# Altium PCB bqZUM_Scan_Shield.PcbDoc
Units mm, origin at the board's own origin, x right, y up, seen from the top; angles counter-clockwise.
Board outline 68.58 x 53.34 mm, 2 copper layers (Top Layer, Bottom Layer), stack 1.671 mm thick; 26 components, 41 nets, 129 pads, 41 vias.
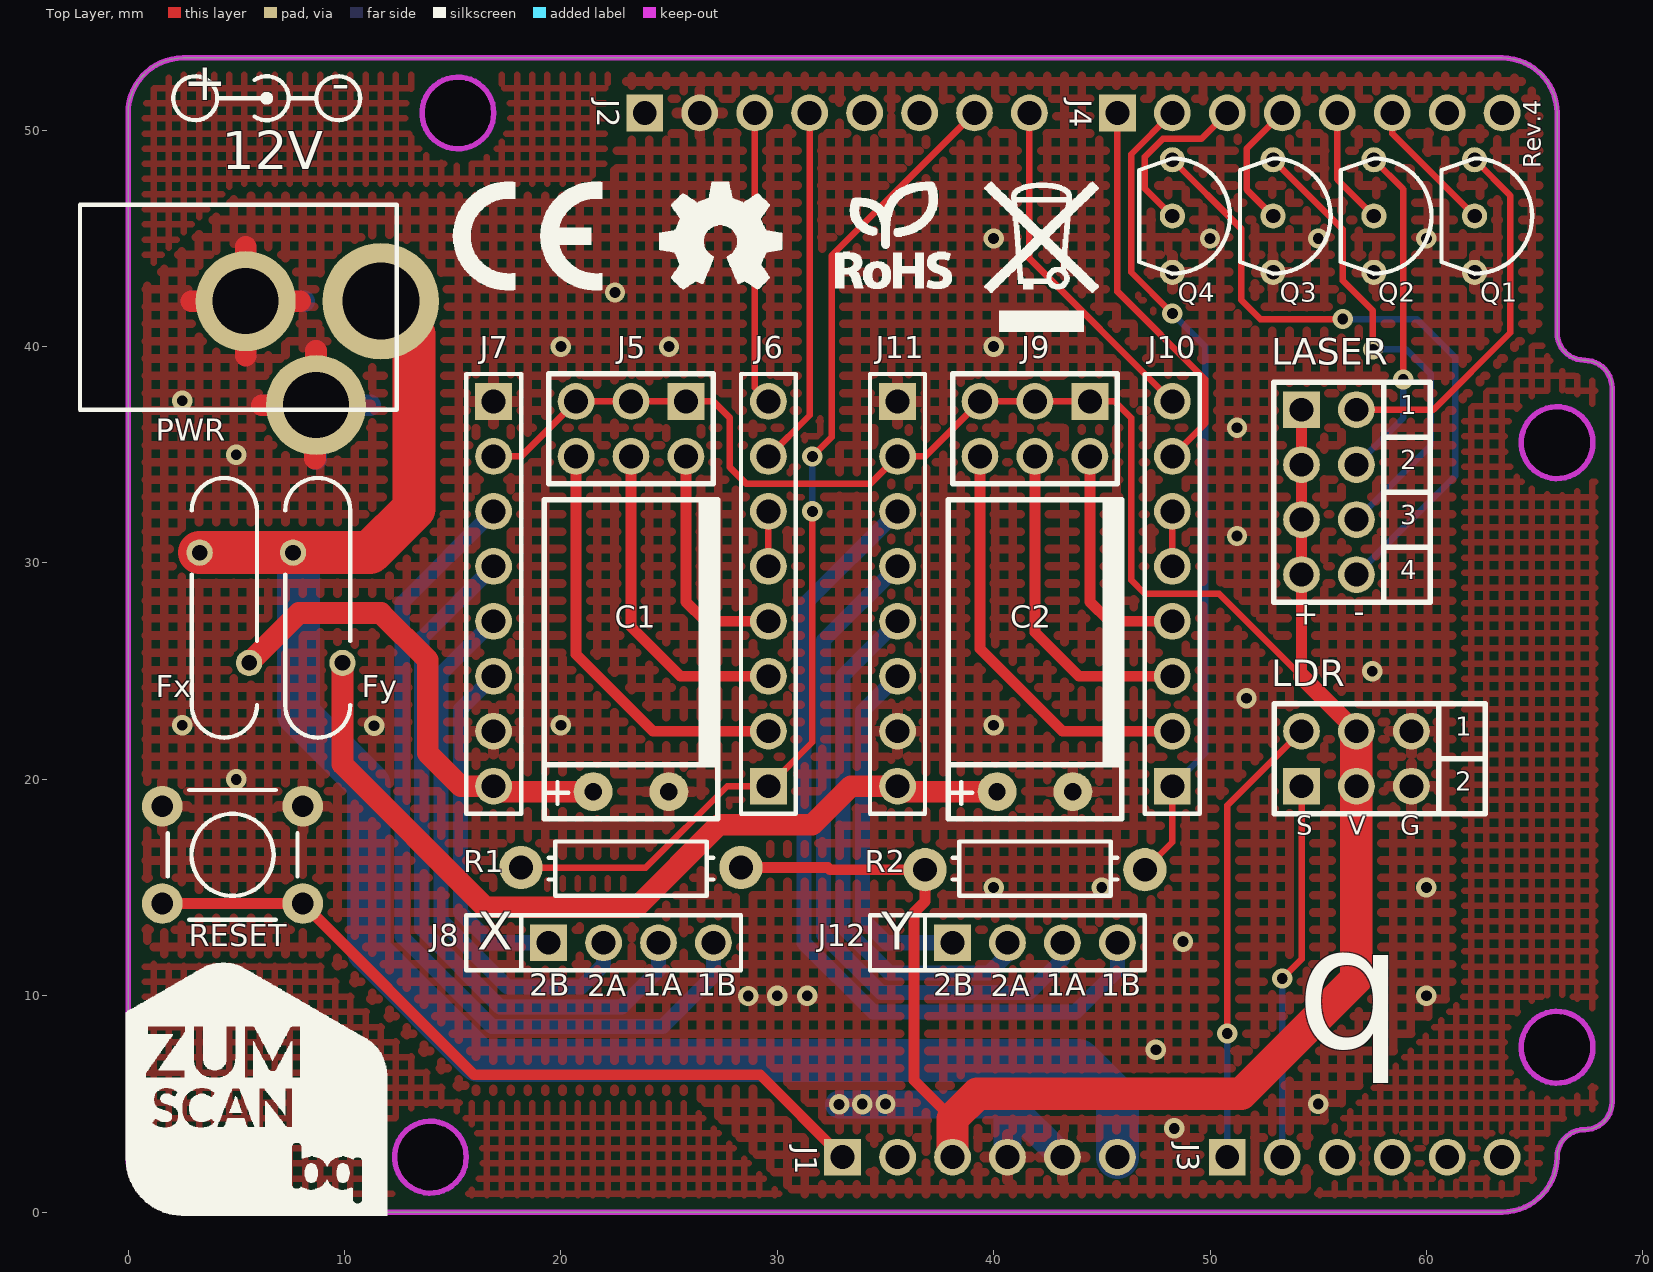
[diagram p0: Top Layer view]
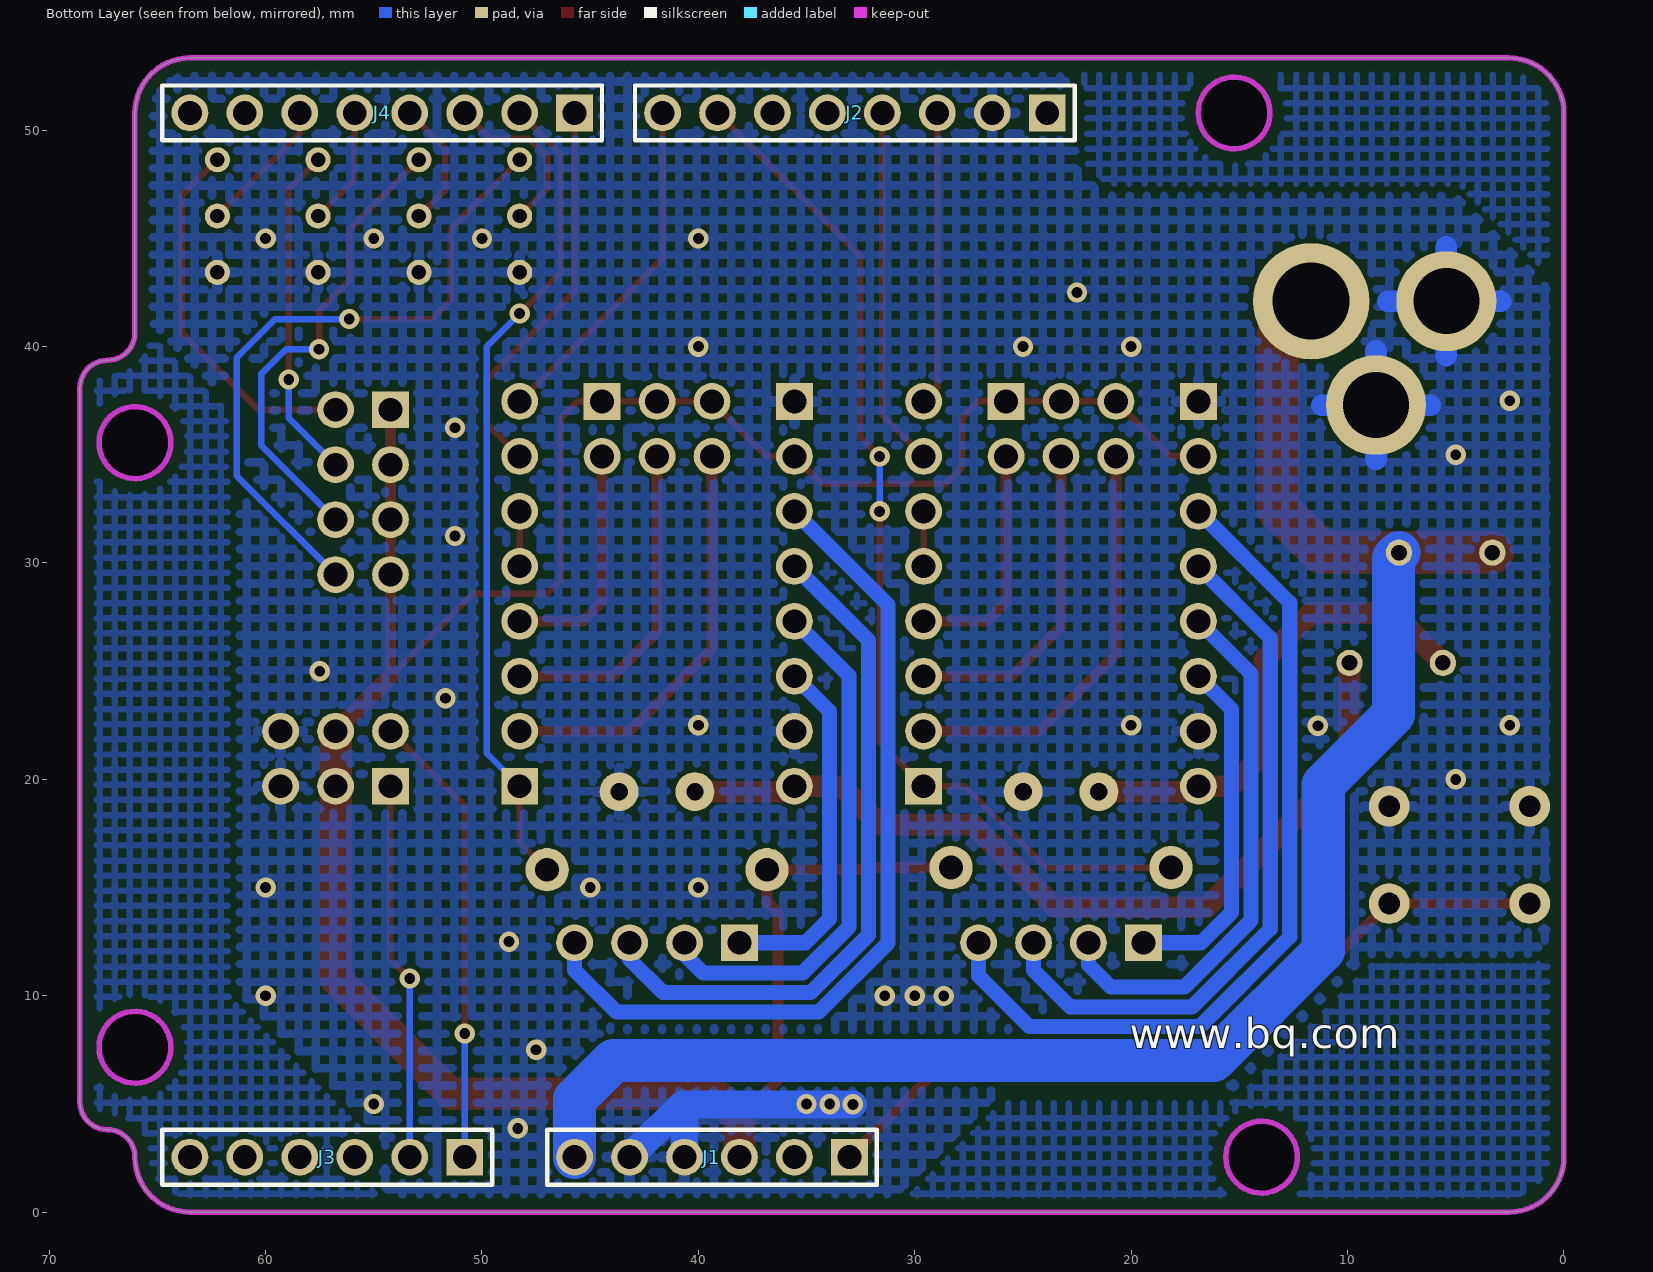
[diagram p1: Bottom Layer view, seen from below]

## Layer stack, top to bottom
Top Solder: solder mask 0.0102, Solder Resist, Dk 3.5
Top Layer: signal copper 0.0356
Dielectric 1: dielectric 1.6, FR-4, Dk 4.8
Bottom Layer: signal copper 0.0356
Bottom Solder: solder mask 0.0102, Solder Resist, Dk 3.5

## Board outline
0,2.54 0,50.8 cw(c2.54,50.8) 2.54,53.34 63.5,53.34 cw(c63.5,50.8) 66.04,50.8 66.04,40.64 ccw(c67.31,40.64) 67.31,39.37 cw(c67.31,38.1) 68.58,38.1 68.58,5.08 cw(c67.31,5.08) 67.31,3.81 ccw(c67.31,2.54) 66.04,2.54 cw(c63.5,2.54) 63.5,0 2.54,0 cw(c2.54,2.54)
cut-out: 64.389,7.62 ccw(c66.04,7.62) 66.04,5.969 ccw(c66.04,7.62) 67.691,7.62 ccw(c66.04,7.62) 66.04,9.271 ccw(c66.04,7.62)
cut-out: 64.389,35.56 ccw(c66.04,35.56) 66.04,33.909 ccw(c66.04,35.56) 67.691,35.56 ccw(c66.04,35.56) 66.04,37.211 ccw(c66.04,35.56)
cut-out: 13.589,50.8 ccw(c15.24,50.8) 15.24,49.149 ccw(c15.24,50.8) 16.891,50.8 ccw(c15.24,50.8) 15.24,52.451 ccw(c15.24,50.8)
cut-out: 12.319,2.54 ccw(c13.97,2.54) 13.97,0.889 ccw(c13.97,2.54) 15.621,2.54 ccw(c13.97,2.54) 13.97,4.191 ccw(c13.97,2.54)

## Design rules (kind name [scope] priority, off if disabled: settings)
Clearance Clearance_KO [OnLayer('Keep-Out Layer')] p1: gap=0.5
Clearance [All] p2: gap=0.2
ComponentClearance [All] p1: gap=0 collisioncheckmode=3 verticalgap=0.254 showdistances=FALSE
HoleSize [All] p1: absolutevalues=TRUE maxlimit=5 minlimit=0.025 maxpercent=80.000 minpercent=20.000
MinimumSolderMaskSliver [All] p1: minsoldermaskwidth=0.1
PlaneConnect [All] p1: planeconnectstyle=Relief reliefexpansion=0.508 reliefentries=4 reliefconductorwidth=0.4 reliefairgap=0.254
PolygonConnect [(InComponentClass('All Components'))] p1: connectstyle=Relief reliefconductorwidth=0.5 reliefentries=4 polygonreliefangle="90 Angle" airgapwidth=0.2
PolygonConnect PolygonConnect_Via [All] p2: connectstyle=Direct reliefconductorwidth=0.3 reliefentries=4 polygonreliefangle="90 Angle" airgapwidth=0.2
RoutingVias [All] p1: holewidth=0.3 width=0.65 viastyle="Through Hole" minholewidth=0.3 minwidth=0.65 maxholewidth=0.711 maxwidth=1.27
SilkToBoardRegionClearance [All] p1 off:
SilkToSilkClearance [All] p1: silktosilkclearance=0
SilkToSolderMaskClearance [IsPad] p1: minsilkscreentomaskgap=0 clearancetoexposedcopper=TRUE
SolderMaskExpansion [All] p1: expansion=0.102
UnpouredPolygon [All] p1: allowunpoured=FALSE
Width [All] p1: maxlimit=3 minlimit=0.3 preferedwidth=0.3
22 further rules are at their usual default settings.

## Components (designator, comment, footprint, x,y, rotation, side; value= is the part's Value field where it differs from the comment)
C1 "Electrolytic" Body_8-Height_11.5-Space_3,5_Folded 23.241,19.431 r0 top
C2 "Electrolytic" Body_8-Height_11.5-Space_3,5_Folded 41.91,19.431 r0 top
Fx "PTC_Fuse" MF-Rxx_S1_12.0 3.302,30.48 r270 top
Fy "PTC_Fuse" MF-Rxx_S1_12.0 7.62,30.48 r270 top
J1 "1x6 pin Header 2.54mm" "1x6 Pin Header 2.54" 33.02,2.54 r0 bottom locked
J2 "1x8 pin Header 2.54mm" "1x8 Pin Header 2.54" 23.876,50.8 r0 bottom locked
J3 "1x6 pin Header 2.54mm" "1x6 Pin Header 2.54" 50.8,2.54 r0 bottom locked
J4 "1x8 pin Header 2.54mm" "1x8 Pin Header 2.54" 45.72,50.8 r0 bottom locked
J5 "2x3 pin Header 2.54mm" "2x3 Pin Header 2.54" 25.781,37.465 r180 top
J6 "1x8 Socket Header 2.54mm" "1x8 Socket Header THT 2.54mm" 29.591,19.685 r90 top
J7 "1x8 Socket Header 2.54mm" "1x8 Socket Header THT 2.54mm" 16.891,37.465 r270 top
J8 "1x4 pin Header 2.54mm" "1x4 Pin Header 2.54" 19.431,12.446 r0 top
J9 "2x3 pin Header 2.54mm" "2x3 Pin Header 2.54" 44.45,37.465 r180 top
J10 "1x8 Socket Header 2.54mm" "1x8 Socket Header THT 2.54mm" 48.26,19.685 r90 top
J11 "1x8 Socket Header 2.54mm" "1x8 Socket Header THT 2.54mm" 35.56,37.465 r270 top
J12 "1x4 pin Header 2.54mm" "1x4 Pin Header 2.54" 38.1,12.446 r0 top
LASER "2x4 pin Header 2.54mm" "2x4 Pin Header 2.54" 54.229,37.084 r270 top
LDR "2x3 pin Header 2.54mm" "2x3 Pin Header 2.54" 54.229,19.685 r0 top
PWR "Power_Jack" "Jack 2.1" 11.684,42.098 r270 top
Q1 "BS170" TO-92-3L 62.23,43.434 r90 top
Q2 "BS170" TO-92-3L 57.573,43.434 r90 top
Q3 "BS170" TO-92-3L 52.917,43.434 r90 top
Q4 "BS170" TO-92-3L 48.26,43.434 r90 top
R1 "Resistor" Resistor_THT_6mm 23.241,15.875 r0 top
R2 "Resistor" Resistor_THT_6mm 41.91,15.875 r180 top
RESET "Switch" SW_THT_6.0x6.0x5.0 4.826,16.51 r0 top

## Footprints (in the part's own frame and the unit in brackets; to place one, negate y for a bottom-side part, rotate by r counter-clockwise, add the part's x,y. Pads: shape width x height; smd on the part's side, far side on the other; paste and mask are expansions set on the pad)
"1x4 Pin Header 2.54" [mm] "4 pin Header pitch 2.54mm"
  rect 1.7x1.7 hole 1.1: 1(0,0)
  round 1.7 hole 1.1: 2(2.54,0) 3(5.08,0) 4(7.62,0)
  silkscreen extent -1.27,-1.27 8.89,1.27, body extent -1.26,-1.25 8.9,1.29, height 8.43
"1x6 Pin Header 2.54" [mm] "6 pin Header pitch 2.54mm"
  rect 1.7x1.7 hole 1.1: 1(0,0)
  round 1.7 hole 1.1: 2(2.54,0) 3(5.08,0) 4(7.62,0) 5(10.16,0) 6(12.7,0)
  silkscreen extent -1.27,-1.27 13.97,1.27, body extent -1.26,-1.25 13.98,1.29, height 8.43
"1x8 Pin Header 2.54" [mm] "8 pin Header pitch 2.54mm"
  rect 1.7x1.7 hole 1.1: 1(0,0)
  round 1.7 hole 1.1: 2(2.54,0) 3(5.08,0) 4(7.62,0) 5(10.16,0) 6(12.7,0) 7(15.24,0) 8(17.78,0)
  silkscreen extent -1.27,-1.27 19.05,1.27, body extent -1.26,-1.25 19.06,1.29, height 8.43
"1x8 Socket Header THT 2.54mm" [mm] "8 Socket Header pitch 2.54mm"
  rect 1.7x1.7 hole 1.1: 1(0,0)
  round 1.7 hole 1.1: 2(2.54,0) 3(5.08,0) 4(7.62,0) 5(10.16,0) 6(12.7,0) 7(15.24,0) 8(17.78,0)
  silkscreen extent -1.27,-1.27 19.05,1.27, body extent -1.4,-1.23 19.17,1.27, height 8.5
"2x3 Pin Header 2.54" [mm] "6 dual pin Header pitch 2.54mm"
  rect 1.7x1.7 hole 1.1: 1(0,0)
  round 1.7 hole 1.1: 2(0,2.54) 3(2.54,0) 4(2.54,2.54) 5(5.08,0) 6(5.08,2.54)
  silkscreen extent -1.27,-1.27 6.35,3.81, body extent -1.25,-1.27 6.37,3.81, height 5.94
"2x4 Pin Header 2.54" [mm] "8 dual pin Header pitch 2.54mm"
  rect 1.7x1.7 hole 1.1: 1(0,0)
  round 1.7 hole 1.1: 2(0,2.54) 3(2.54,0) 4(2.54,2.54) 5(5.08,0) 6(5.08,2.54) 7(7.62,0) 8(7.62,2.54)
  silkscreen extent -1.27,-1.28 8.89,3.81, body extent -1.34,-1.28 8.82,3.8, height 8.54
Body_8-Height_11.5-Space_3,5_Folded [mm] "Electrolytic Cap. 8mm diameter, 11.5 mm height, 3.5mm lead space."
  round 1.8 hole 0.8: 1(-1.75,0) 2(1.75,0)
  silkscreen extent -4,-1.25 4,13.5, body extent -3.98,-0.35 4.08,13.48, height 8.03
"Jack 2.1" [mm] "DC Power Jack 2,1mm"
  round 5.38 hole 3.56: 1(0,0)
  round 4.62 hole 3.05: 2(4.8,-3) 3(0,-6.25)
  silkscreen extent -4.46,-13.91 5.01,0.73, body extent -4.44,-13.86 5.08,0.74, height 10.92
MF-Rxx_S1_12.0 [mm] "PTC Resettable Fuses 12.0x3.0"
  round 1.22 hole 0.72: 1(0,0) 2(5.1,2.286)
  silkscreen extent -3.45,-0.36 8.55,2.65, body extent -2.31,-0.38 7.39,2.67, height 15.85
Resistor_THT_6mm [mm] "Resistor, 6.3mm body, 0.6mm lead"
  round 2 hole 1.1: 1(-5.08,0.05) 2(5.08,0.05)
  silkscreen extent -3.8,-1.25 3.8,1.25, body extent -5.44,-1.23 5.36,1.17, height 3.1
SW_THT_6.0x6.0x5.0 [mm] "Switch THT 6.0x6.0mm, actuartor 1.4mm"
  round 1.88 hole 1: 1(-3.25,2.25) 1(3.25,2.25) 2(-3.25,-2.25) 2(3.25,-2.25)
  silkscreen extent -3,-3 3,3, body extent -3.9,-2.99 3.9,3, height 5
TO-92-3L [mm] "TO-92-3L"
  round 1.16 hole 0.66 mask+0: 1(0,0) 2(2.6,0) 3(5.2,0)
  silkscreen extent -0.06,-2.66 5.26,1.53, body extent -0.25,-2.66 5.49,1.53, height 9.33

## Part data
C1 C2: library part CAP_EL_100uF_50V, "Capacitor Electrolytic"
Fx Fy: library part "FUSE 1.85A 30V", "PTC Resettable Fuse"
J1 J3: library part CON_PH_THT2.54_6
J2 J4: library part CON_PH_THT2.54_8
J5 J9 LDR: library part CON_DPH_THT2.54_6, "6 pin Dual Header 2.54mm"
J6 J7 J10 J11: library part CON_SH_THT2.54_8, "8 pin Socket Header 2.54mm"
J8 J12: library part CON_PH_THT2.54_4
LASER: library part CON_DPH_THT2.54_8, "8 pin Dual Header 2.54mm"
PWR: library part "DC Power Jack", "DC Power Jack"
Q1 Q2 Q3 Q4: "Mosfet Channel N Enhancement Mode"
R1 R2: library part R_10k_250mW_±5%
RESET: library part "SW THT 6x6x5", "Micro miniature pushbutton surface Switch"

## Free pads (board coordinates)
  round 1.524 hole 3.3 unplated: 0(13.97,2.54) 0(15.24,50.8) 0(66.04,7.62) 0(66.04,35.56)

## Via types
v1: diameter 0.94, hole 0.5, Top Layer to Bottom Layer, 41 vias

## Nets (pads, with @x,y where several pads share a name; then routed paths per layer and width w, separated by ;. In a path a pad name is that pad's centre, name@x,y a point inside that pad or via, vN(x,y) a via of type N, cw(c..) or ccw(c..) an arc to the next point about the centre after c; other vN are vias at no path point)
5V_HP: J1.3 J5.1 J5.3 J5.5 J7.2 J9.1 J9.3 J9.5 J11.2 LASER.1 LASER.3 LASER.5 LASER.7 LDR.3 LDR.4 R1.2 R2.2 | length 124
  Top Layer w0.3: J7.2 18.161,34.925 J5.5 J5.3 J5.1 27.051,37.465 27.813,36.703 27.813,34.417 28.575,33.655 34.29,33.655 J11.2 36.83,34.925 J9.5 J9.3 J9.1 45.593,37.465 46.355,36.703 46.355,29.21 46.99,28.575 50.419,28.575 54.229,24.765
  Top Layer w0.5: R1.2 32.335,15.925 32.435,15.825 R2.2 36.83,14.351 36.322,13.843 36.322,6.096 38.1,4.318 ; 54.229,24.765 LASER.7 LASER.5 LASER.3 LASER.1
  Top Layer w0.8: 54.229,24.765 LDR.4
  Top Layer w1.5: J1.3 38.1,4.318 39.243,5.461 51.435,5.461 56.769,10.795 LDR.3 LDR.4
EXT_V: Fx.1 Fy.1 J1.6 PWR.1 | length 80.9
  Top Layer w2: Fx.1 Fy.1 11.176,30.48 13.208,32.512 13.208,40.574 PWR.1
  Bottom Layer w2: Fy.1 7.87,30.23 7.87,23.01 11.117,19.763 11.117,12.083 16.19,7.01 43.92,7.01 45.72,5.21 J1.6
EXT_V1: C1.1 Fx.2 J7.8 | length 22.8
  Top Layer w1: Fx.2 7.894,27.686 11.684,27.686 13.843,25.527 13.843,21.209 15.367,19.685 J7.8 17.145,19.431 C1.1
EXT_V2: C2.1 Fy.2 J11.8 | length 40.1
  Top Layer w1: Fy.2 9.906,20.701 16.51,14.097 23.495,14.097 27.305,17.907 31.623,17.907 33.401,19.685 J11.8 35.814,19.431 C2.1
GND: C1.2 C2.2 J1.4 J1.5 J2.2 J7.1 J7.7 J11.1 J11.7 LDR.5 LDR.6 PWR.2 PWR.3 Q1.1 Q2.1 Q3.1 Q4.1 RESET.1 | length 51.7
  Top Layer w1: 2.924,42.098 PWR.3 ; 5.434,39.588 PWR.3 ; 5.434,44.608 PWR.3 ; 6.174,37.298 PWR.2@8.636,37.298 ; 7.944,42.098 PWR.3 ; 8.636,34.828 PWR.2@8.636,37.298 ; PWR.2@8.636,37.338 PWR.2@8.636,37.298 ; 8.684,39.808 PWR.2 PWR.2@8.636,37.298
  Bottom Layer w1: 2.924,42.098 PWR.3 ; 5.434,39.588 PWR.3 ; 5.434,44.608 PWR.3 ; 6.174,37.298 PWR.2 ; 8.144,42.098 PWR.3 ; 8.684,34.788 PWR.2 ; 8.684,39.808 PWR.2 ; 11.194,37.298 PWR.2
  Bottom Layer w1.3: v1(32.86,4.98) 40.74,4.98 ; J1.4 40.64,4.88 40.74,4.98 ; J1.5 40.74,4.98
  other v1: 48.35,3.87 33.93,4.99 35,5 55,5 47.5,7.5 28.66,9.99 30,10 31.39,10 60,10 48.75,12.5 40,15 45,15 60,15 5,20 11.37,22.48 2.5,22.5 20,22.5 40,22.5 51.689,23.749 57.5,25 51.25,31.25 5,35 51.25,36.25 2.5,37.5 20,40 25,40 40,40 22.5,42.5 40,45 50,45 55,45 60,45
LASER_1: J4.6 Q1.2 | length 6.3
  Top Layer w0.3: J4.6 58.42,49.844 Q1.2
LASER_2: J4.5 Q2.2 | length 5.5
  Top Layer w0.3: J4.5 55.88,47.727 Q2.2
LASER_3: J4.4 Q3.2 | length 6
  Top Layer w0.3: Q3.2 51.689,47.262 51.689,49.149 J4.4
LASER_4: J4.3 Q4.2 | length 7.9
  Top Layer w0.3: Q4.2 46.99,47.304 46.99,48.768 47.822,49.6 49.6,49.6 J4.3
LDR1: J3.1 LDR.2 | length 21.1
  Top Layer w0.3: v1(50.8,8.255) 50.8,18.796 LDR.2
  Bottom Layer w0.3: J3.1 v1(50.8,8.255)
LDR2: J3.2 LDR.1 | length 17.5
  Top Layer w0.3: v1(53.34,10.795) 54.229,11.684 LDR.1
  Bottom Layer w0.3: J3.2 v1(53.34,10.795)
LSR_1: LASER.2 Q1.3 | length 17.3
  Top Layer w0.3: LASER.2 60.325,37.084 63.881,40.64 63.881,46.983 Q1.3
LSR_2: LASER.4 Q2.3 | length 15.5
  Top Layer w0.3: Q2.3 58.928,47.279 v1(58.928,38.481)
  Bottom Layer w0.3: LASER.4 58.928,36.703 v1(58.928,38.481)
LSR_3: LASER.6 Q3.3 | length 22
  Top Layer w0.3: Q3.3 56.134,45.417 56.134,43.053 57.531,41.656 v1(57.531,39.878)
  Bottom Layer w0.3: LASER.6 60.198,35.433 60.198,38.735 59.055,39.878 v1(57.531,39.878)
LSR_4: LASER.8 Q4.3 | length 30.7
  Top Layer w0.3: Q4.3 51.435,45.459 51.435,42.164 52.324,41.275 v1(56.134,41.275)
  Bottom Layer w0.3: v1(56.134,41.275) 59.552,41.275 61.341,39.486 61.341,34.036 LASER.8
NetJ6_5: J6.5 J6.6 | length 2.5
  Top Layer w0.3: J6.5 J6.6
NetJ10_5: J10.5 J10.6 | length 2.5
  Top Layer w0.3: J10.5 J10.6
R\S\T\: J1.1 RESET.2 | length 36.3
  Top Layer w0.5: RESET.2@1.576,14.26 8.076,14.26 15.986,6.35 29.21,6.35 J1.1
USB_3V: J1.2
X1A: J7.4 J8.3 | length 32.5
  Bottom Layer w0.7: J7.4 13.567,26.521 13.567,13.097 17.184,9.48 22.815,9.48 24.511,11.176 J8.3
X1B: J7.3 J8.4 | length 40
  Bottom Layer w0.7: J7.3 12.667,28.161 12.667,12.725 16.812,8.58 24.709,8.58 27.051,10.922 J8.4
X2A: J7.5 J8.2 | length 25.1
  Bottom Layer w0.7: J7.5 14.467,24.881 14.467,13.47 17.537,10.4 20.941,10.4 21.971,11.43 J8.2
X2B: J7.6 J8.1 | length 16.2
  Bottom Layer w0.7: J7.6 15.367,23.241 15.367,13.843 16.764,12.446 J8.1
X-CUR: J2.6
X-DIR: J2.3 J6.8 | length 13.6
  Top Layer w0.3: J2.3 28.956,38.1 J6.8
X-EN: J2.7 J6.1 R1.1 | length 48
  Top Layer w0.3: R1.1 23.926,15.925 27.686,19.685 J6.1 31.623,21.717 v1(31.623,32.385) ; v1(31.623,34.925) 32.512,35.814 32.512,44.196 J2.7
  Bottom Layer w0.3: v1(31.623,32.385) v1(31.623,34.925)
X-STEP: J2.4 J6.7 | length 16.7
  Top Layer w0.3: J6.7 31.496,36.83 J2.4
XMS1: J5.6 J6.2 | length 19.5
  Top Layer w0.5: J5.6 20.701,25.781 24.257,22.225 J6.2
XMS2: J5.4 J6.3 | length 15.2
  Top Layer w0.5: J5.4 23.241,27.051 25.527,24.765 J6.3
XMS3: J5.2 J6.4 | length 10.9
  Top Layer w0.5: J5.2 25.781,28.194 26.67,27.305 J6.4
Y1A: J11.4 J12.3 | length 32
  Bottom Layer w0.7: J11.4 32.142,26.427 32.142,12.81 34.806,10.146 41.642,10.146 43.18,11.684 J12.3
Y1B: J11.3 J12.4 | length 39.6
  Bottom Layer w0.7: J11.3 31.242,28.067 31.242,12.438 34.434,9.246 43.79,9.246 45.72,11.176 J12.4
Y2A: J11.5 J12.2 | length 24.5
  Bottom Layer w0.7: J11.5 33.042,24.787 33.042,13.183 35.179,11.046 39.781,11.046 40.64,11.905 J12.2
Y2B: J11.6 J12.1 | length 16.5
  Bottom Layer w0.7: J11.6 33.942,23.147 33.942,13.556 35.052,12.446 J12.1
Y-CUR: J2.5
Y-DIR: J2.8 J10.8 | length 16.1
  Top Layer w0.3: J2.8 41.656,44.069 J10.8
Y-EN: J4.2 J10.1 R2.1 | length 38.3
  Top Layer w0.3: R2.1 48.26,17.095 J10.1 ; v1(48.26,41.529) 46.355,43.434 46.355,48.895 J4.2
  Bottom Layer w0.3: J10.1 49.784,21.209 49.784,40.005 v1(48.26,41.529)
Y-STEP: J4.1 J10.7 | length 18.2
  Top Layer w0.3: J4.1 45.72,42.545 49.784,38.481 49.784,36.449 J10.7
YMS1: J9.6 J10.2 | length 19.4
  Top Layer w0.5: J9.6 39.37,26.035 43.18,22.225 J10.2
YMS2: J9.4 J10.3 | length 15.3
  Top Layer w0.5: J9.4 41.91,26.797 43.942,24.765 J10.3
YMS3: J9.2 J10.4 | length 10.9
  Top Layer w0.5: J9.2 44.45,28.194 45.339,27.305 J10.4
pads on no net: J2.1 J3.3 J3.4 J3.5 J3.6 J4.7 J4.8

## Polygon pours and split planes (outlines as drawn)
no net on Top Layer "TL-NoNet" (hatched 90Degree grid 0.7 track 0.3, remove dead copper, pour order 6): -0.017,2.012 1.988,0.007 63.944,0.007 68.515,4.578 68.515,4.884 68.515,38.335 65.986,40.864 65.986,51.231 63.944,53.273 63.919,53.298 2.237,53.298 2.013,53.298 -0.017,51.268
GND on Top Layer "TL-GND" (hatched 90Degree grid 0.8 track 0.4, remove dead copper, pour order 8): -0.025,13.451 1.499,11.927 9.119,11.927 15.469,5.577 26.137,5.577 31.725,-0.011 53.315,-0.011 54.585,1.259 54.585,3.545 61.189,10.149 61.189,37.073 66.015,41.899 65.978,51.842 64.479,53.341 24.105,53.329 22.581,51.805 22.581,48.249 21.311,46.979 5.055,46.979 -0.025,41.899
GND on Bottom Layer "TL-GND" (hatched 90Degree grid 0.8 track 0.4, remove dead copper, pour order 7): -0.025,13.451 1.499,11.927 9.119,11.927 15.469,5.577 26.137,5.577 31.725,-0.011 53.315,-0.011 54.585,1.259 54.585,3.545 61.189,10.149 61.189,37.073 66.015,41.899 65.978,51.842 64.479,53.341 24.105,53.329 22.581,51.805 22.581,48.249 21.311,46.979 5.055,46.979 -0.025,41.899
no net on Bottom Layer "TL-NoNet" (hatched 90Degree grid 0.7 track 0.3, remove dead copper, pour order 5): 0,2.005 2.005,0 63.961,0 68.532,4.571 68.532,4.878 68.532,38.328 66.003,40.857 66.003,51.224 63.961,53.267 63.937,53.291 2.254,53.291 2.03,53.291 0,51.261

## Keep-outs
Keep-Out Layer:
  circle w0.254: c15.24,50.8 r1.659
  circle w0.254: c66.04,35.56 r1.659
  circle w0.254: c66.04,7.62 r1.659
  circle w0.254: c13.97,2.54 r1.659
  lines w0.254: 0,2.54 ccw(c2.54,2.54) 2.54,0 63.5,0 ccw(c63.5,2.54) 66.04,2.54 cw(c67.31,2.54) 67.31,3.81 ccw(c67.31,5.08) 68.58,5.08 68.58,38.1 ccw(c67.31,38.1) 67.31,39.37 cw(c67.31,40.64) 66.04,40.64 66.04,50.8 ccw(c63.5,50.8) 63.5,53.34 2.54,53.34 ccw(c2.54,50.8) 0,50.8 0,2.54

## Silkscreen, mask and mechanical layers (free items; w line width, h text height)
Top Overlay:
  drawing of 3793 lines, arcs and shapes, not listed
  text "+" at 2.54,50.8 h3
  text "-" at 9.398,50.8 h3
  text "Rev.4" at 65.57,48.24 h1.4 r90
  text "12V" at 4.318,47.625 h3
  text "1" at 58.801,36.576 h1.5
  text "2" at 58.801,34.036 h1.5
  text "3" at 58.801,31.496 h1.5
  text "4" at 58.801,28.956 h1.5
  text "-" at 56.642,26.924 h1.75
  text "+" at 53.848,26.797 h1.75
  text "1" at 61.341,21.717 h1.5
  text "2" at 61.341,19.177 h1.5
  text "S" at 53.975,17.145 h1.5
  text "V" at 56.388,17.145 h1.5
  text "G" at 58.801,17.145 h1.5
  text "X" at 16.129,11.557 h3
  text "Y" at 34.798,11.557 h3
  text "2B" at 18.542,9.652 h1.75
  text "2A" at 21.209,9.652 h1.7
  text "1A" at 23.749,9.652 h1.75
  text "1B" at 26.289,9.652 h1.75
  text "2B" at 37.211,9.652 h1.75
  text "2A" at 39.878,9.652 h1.7
  text "1A" at 42.418,9.652 h1.75
  text "1B" at 44.958,9.652 h1.75
  text "q" at 53.975,5.715 h9.8
Bottom Overlay:
  text "www.bq.com" at 20.066,7.112 h2.4
Mechanical 1:
  the board outline again, w0.254

## Dimensions
2.54,0 to 2.54,53.34 on Mechanical 1
0,2.54 to 68.58,5.08 on Mechanical 1